# Altium PCB Baja_PDU_004.PcbDoc
Units mil, origin at the board's own origin, x right, y up, seen from the top; angles counter-clockwise.
Board outline 5514 x 3498 mil, 2 copper layers (Top Layer, Bottom Layer); 96 components, 52 nets, 401 pads, 97 vias.
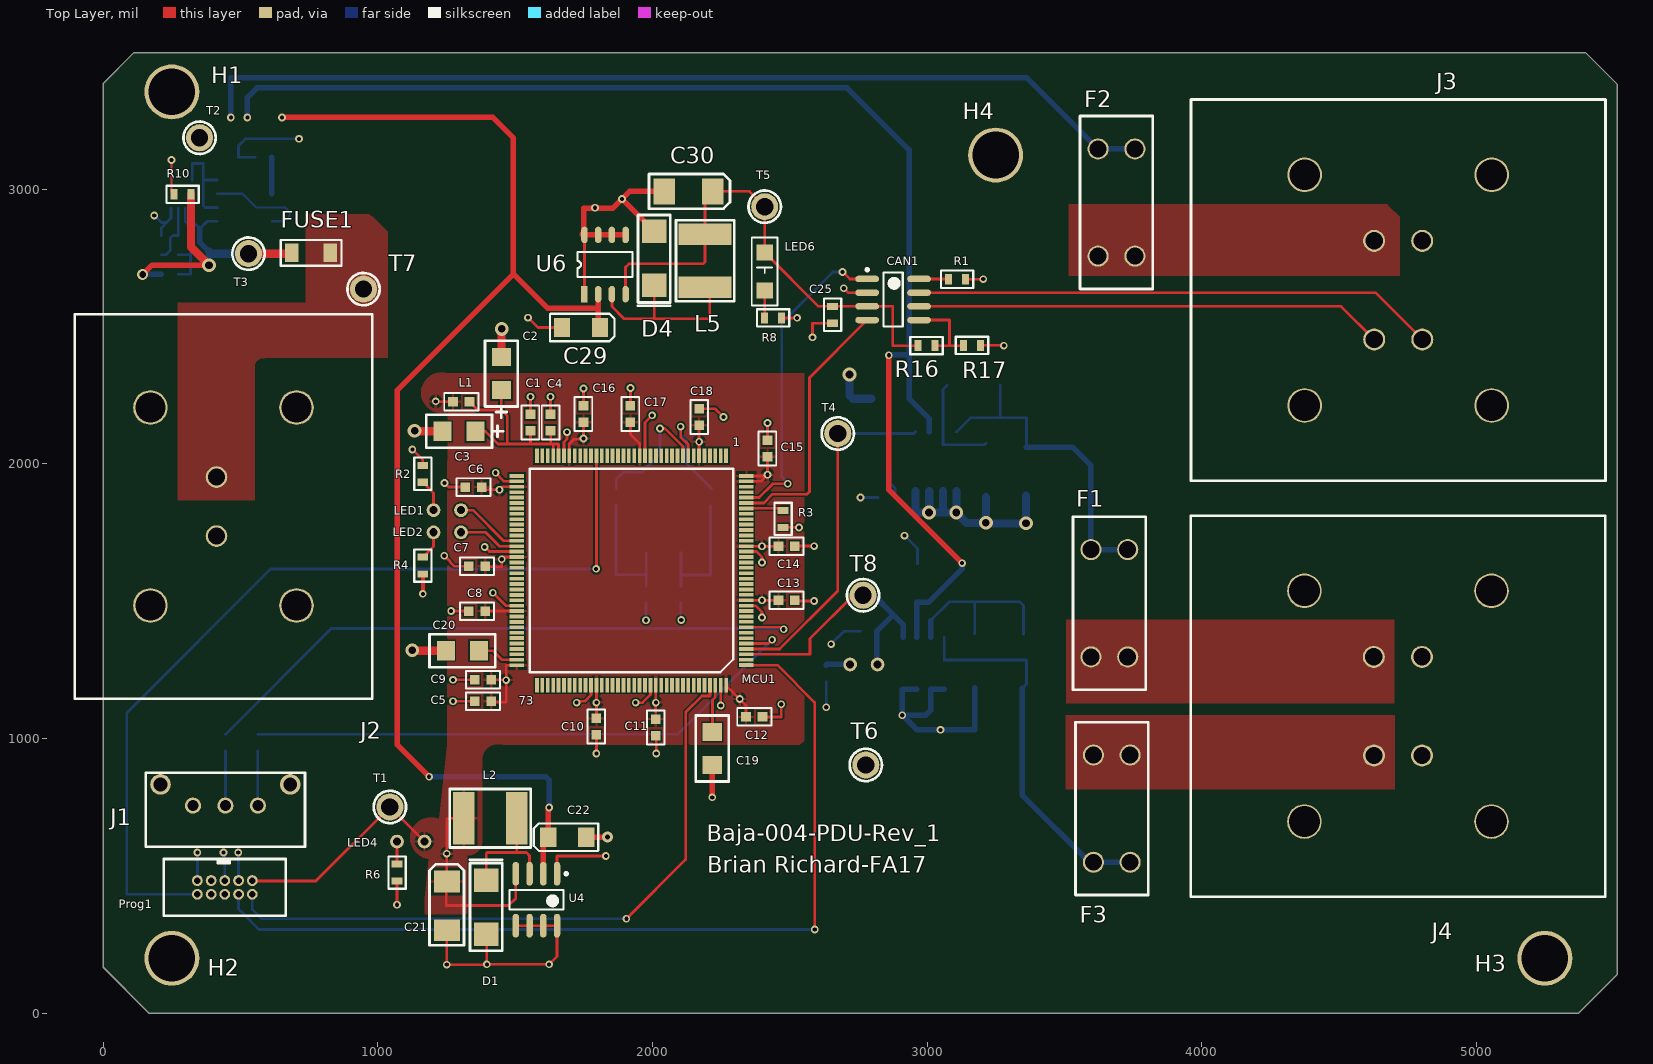
[diagram p0: Top Layer view]
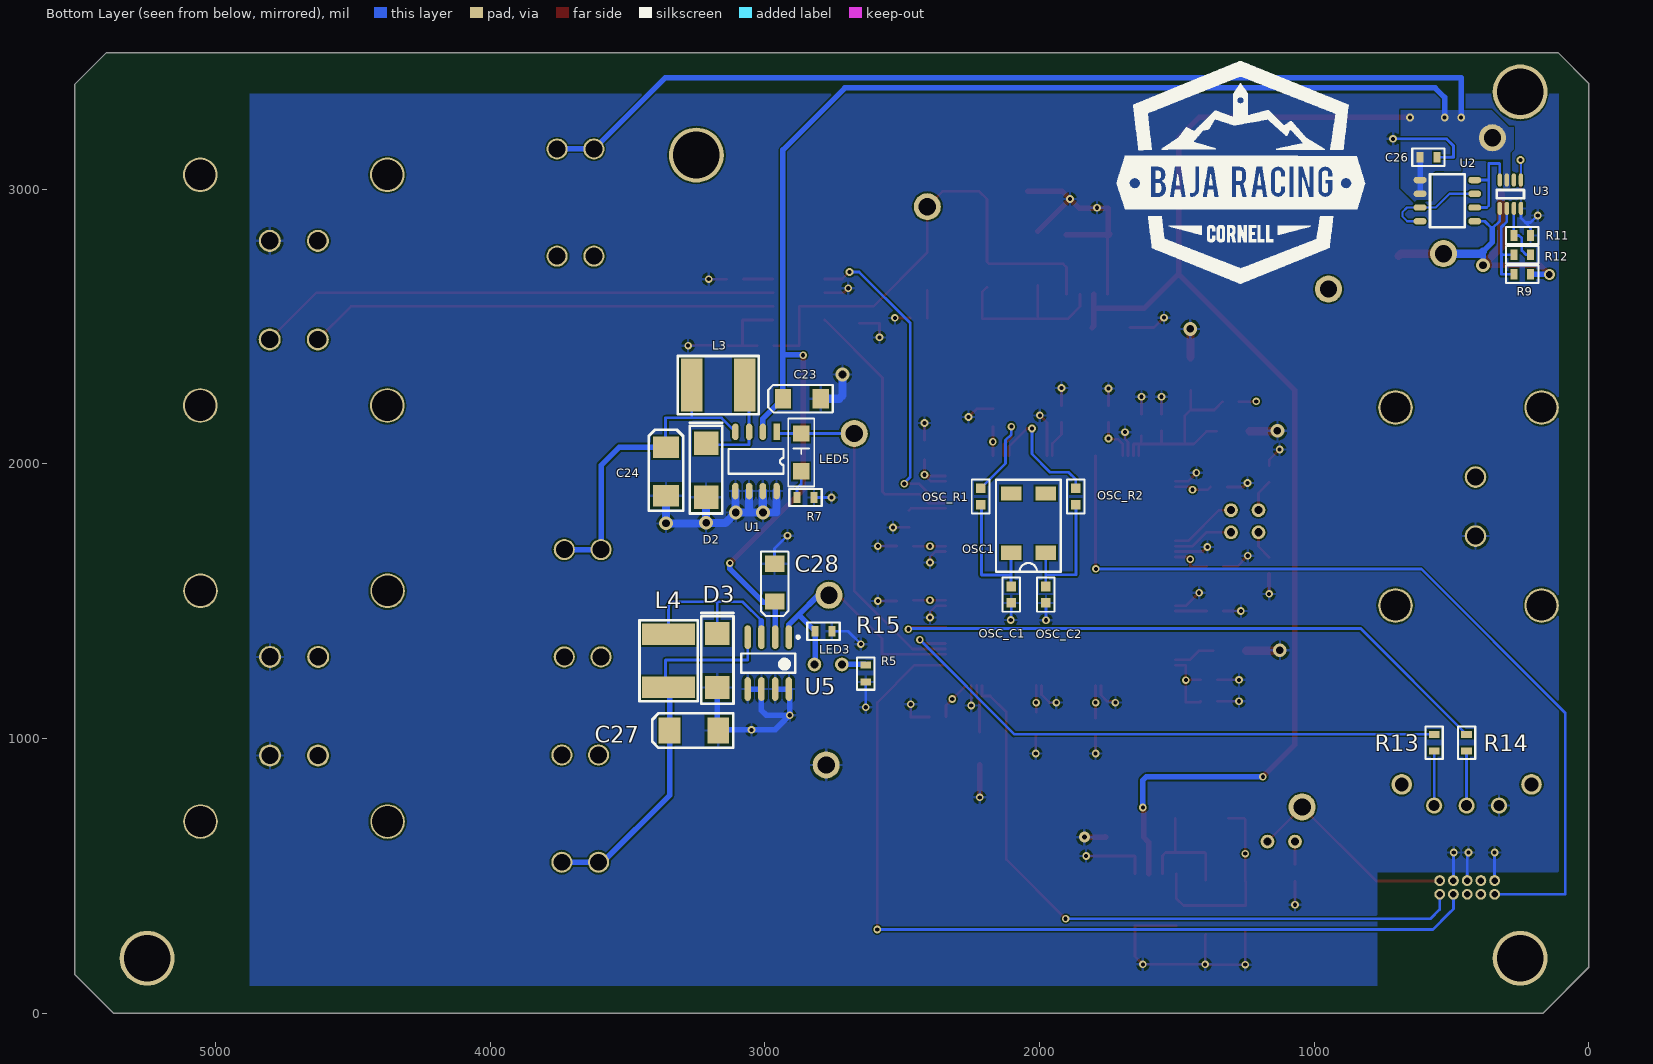
[diagram p1: Bottom Layer view, seen from below]

## Layer stack, top to bottom
Top Solder: solder mask 0.4, Solder Resist, Dk 3.5
Top Layer: signal copper 1.4
Dielectric1: core 12.6, FR-4, Dk 4.8
Bottom Layer: signal copper 1.4
Bottom Solder: solder mask 0.4, Solder Resist, Dk 3.5

## Board outline
0,167 0,3386 112,3498 5398,3498 5514,3382 5514,142 5372,0 167,0

## Design rules (kind name [scope] priority, off if disabled: settings)
Clearance "Fill Spacing" [InPolygon] p1: gap=6
Clearance [All] p2: gap=6
Height [All] p1: minheight=0 maxheight=2500 prefheight=500
HoleSize [All] p1: absolutevalues=TRUE maxlimit=500 minlimit=15 maxpercent=80.000 minpercent=20.000
MinimumAnnularRing MinimumAnnularRing_Component [InComponent('*63')] p1: minimumring=7
MinimumAnnularRing [All] p2: minimumring=5
MinimumSolderMaskSliver MCU [InComponent('MCU1')] p1: minsoldermaskwidth=0
MinimumSolderMaskSliver Prog [InComponent('Prog1')] p2: minsoldermaskwidth=0
MinimumSolderMaskSliver MinimumSolderMaskSliver_1 [All] p3: minsoldermaskwidth=10
PolygonConnect "Power Polys" [All vs (InNet('POWER_IN') OR InNet('POWER') OR InNet('12V') OR InNet('NetF3_3') OR InNet('NetF1_3') OR InNet('NetF2_3'))] p1: connectstyle=Direct reliefconductorwidth=10 reliefentries=4 polygonreliefangle="90 Angle" airgapwidth=10
PolygonConnect PolygonConnect_1 [All] p2: connectstyle=Relief reliefconductorwidth=10 reliefentries=4 polygonreliefangle="90 Angle" airgapwidth=10
RoomDefinition Baja_PDU_004 [InComponentClass('Baja_PDU_004')] p1 off: confinementstyle=ConfineIn formatcopy=TRUE lockcomponents=FALSE outline -1996,-1648.7 4,-1648.7 4,-648.7 -1996,-648.7
RoomDefinition U_JTAG [InComponentClass('U_JTAG')] p2 off: confinementstyle=ConfineIn formatcopy=TRUE lockcomponents=FALSE outline -1996,-1648.7 4,-1648.7 4,-648.7 -1996,-648.7
RoomDefinition J_Serial [InComponentClass('J_Serial')] p3 off: confinementstyle=ConfineIn formatcopy=TRUE lockcomponents=FALSE outline -1996,-1648.7 4,-1648.7 4,-648.7 -1996,-648.7
RoomDefinition U_Power_Supplies [InComponentClass('U_Power_Supplies')] p4 off: confinementstyle=ConfineIn formatcopy=TRUE lockcomponents=FALSE outline -1996,-1648.7 4,-1648.7 4,-648.7 -1996,-648.7
RoomDefinition U_MCU [InComponentClass('U_MCU')] p5 off: confinementstyle=ConfineIn formatcopy=TRUE lockcomponents=FALSE outline -1996,-1648.7 4,-1648.7 4,-648.7 -1996,-648.7
RoomDefinition U_CAN [InComponentClass('U_CAN')] p6 off: confinementstyle=ConfineIn formatcopy=TRUE lockcomponents=FALSE outline -1996,-1648.7 4,-1648.7 4,-648.7 -1996,-648.7
RoutingVias [All] p1: holewidth=28 width=50 viastyle="Through Hole" minholewidth=28 minwidth=50 maxholewidth=28 maxwidth=50
SilkToSolderMaskClearance SilkscreenOverComponentPads [IsPad] p1: minsilkscreentomaskgap=5 clearancetoexposedcopper=TRUE
SolderMaskExpansion [All] p1: expansion=4
UnpouredPolygon [All] p1: allowunpoured=FALSE
Width [All] p1: maxlimit=40 minlimit=4 preferedwidth=10
25 further rules are at their usual default settings.

## Classes and differential pairs
component class Baja_PDU_004: H1 H2 H3 H4 J2 J3 J4
component class J_Serial: J1 R13 R14
component class U_CAN: C25 CAN1 R1 R16 R17
component class U_Power_Supplies: C21 C22 C23 C24 C26 C27 C28 C29 C30 D1 D2 D3 D4 F1 F2 F3 FUSE1 L2 L3 L4 L5 LED3 LED4 LED5 LED6 R5 R6 R7 R8 R9 R10 R11 R12 R15 T1 T2 T3 T4 T5 T6 T7 T8 U1 U2 U3 U4 U5 U6
component class U_JTAG: Prog1
component class U_MCU: C1 C2 C3 C4 C5 C6 C7 C8 C9 C10 C11 C12 C13 C14 C15 C16 C17 C18 C19 C20 L1 LED1 LED2 MCU1 OSC1 OSC_C1 OSC_C2 OSC_R1 OSC_R2 R2 R3 R4

## Components (designator, comment, footprint, x,y, rotation, side; value= is the part's Value field where it differs from the comment)
C1 "Cap" SMD0603 1556,2151 r270 top
C2 "Cap" "SMD1206 Polarized" 1450,2329 r90 top
C3 "Cap" "SMD1206 Polarized" 1296,2119 r180 top
C4 "Cap" SMD0603 1629,2151 r90 top
C5 "Cap" SMD0603 1383,1136 r180 top
C6 "Cap" SMD0603 1348,1916 r0 top
C7 "Cap" SMD0603 1361,1628 r0 top
C8 "Cap" SMD0603 1361,1464.36 r0 top
C9 "Cap" SMD0603 1383,1214 r0 top
C10 "Cap" SMD0603 1796.05,1043.5 r90 top
C11 "Cap" SMD0603 2012.58,1041 r90 top
C12 "Cap" SMD0603 2371,1079 r180 top
C13 "Cap" SMD0603 2489,1503.73 r180 top
C14 "Cap" SMD0603 2489,1700.58 r180 top
C15 "Cap" SMD0603 2419,2056 r270 top
C16 "Cap" SMD0603 1749,2182 r270 top
C17 "Cap" SMD0603 1920,2182 r270 top
C18 "Cap" SMD0603 2170.06,2171 r90 top
C19 "Cap" SMD1206 2218,964 r90 top
C20 "Cap" SMD1206 1308,1320 r0 top
C21 "220 uF Tantalum Capacitor" "2312 Surface Mount (POLAR)" 1204,519 r0 top
C22 "15 uF Tantalum Capacitor" "1206 (POLAR)" 1690,641 r180 top
C23 "15 uF Tant" "1206 (POLAR)" 2866,2238 r0 bottom
C24 "220 uF Tant" "2312 Surface Mount (POLAR)" 3408,2101 r180 bottom
C25 ".1uF 0603" "0603/1608 SMD Resistor" 2656,2543 r270 top
C26 "0603 Cap" "0603/1608 SMD Resistor" 583.98,3117 r180 bottom
C27 "220 uF Tantalum Capacitor" "2312 Surface Mount (POLAR)" 3387,982 r90 bottom
C28 "15 uF Tantalum Capacitor" "1206 (POLAR)" 2965,1568 r270 bottom
C29 "15 uF Tant" "1206 (POLAR)" 1740,2497 r0 top
C30 "220 uF Tant" "2312 Surface Mount (POLAR)" 2259,3040 r270 top
CAN1 "CAN MAX3059" TJA1040 2876.51,2599 r0 top
D1 "B260A Flyback Diode" DO-214AC 1430,535 r270 top
D2 "B260A" DO-214AC 3179,2127 r270 bottom
D3 "B260A Flyback Diode" DO-214AC 3138,1434 r270 bottom
D4 "B260A" DO-214AC 1971,2600 r90 top
F1 "Keystone Fuseholder" "Keystone Fuseholder 3568" 3673,745 r0 top
F2 "Keystone Fuseholder" "Keystone Fuseholder 3568" 3690,2952 r180 top
F3 "Keystone Fuseholder" "Keystone Fuseholder 3568" 3664,1493 r180 top
FUSE1 "SMT fuse" 1206 757,2769 r0 top
H1 "MH-832" MH-832#1 215,3355 r0 top
H2 "MH-832" MH-832#2 217,163 r0 top
H3 "MH-832" MH-832#3 5359,150 r0 top
H4 "MH-832" MH-832#4 3253,3131 r0 top
J1 "Microfit Vert 3" "MICRO-FIT 3 POS VERT THROUGH HOLE" 445,756 r180 top
J2 "DT15-2P" Connector-DT15-2P 446,1845 r180 top
J3 "DT15-4P" DT15-4P 4716,2633 r270 top
J4 "DT15-4P" DT15-4P 4715,1118 r270 top
L1 "BEAD" SMD0603 1304,2227 r0 top
L2 "ASPI-6045S" ASPI-6045 1506,706 r270 top
L3 "Inductor" ASPI-6045 3074,2283 r270 bottom
L4 "ASPI-6045S" ASPI-6045 3347,1380 r180 bottom
L5 "Inductor" ASPI-6045 2188,2644 r180 top
LED1 "Green LED 1206" Panel_Mount_LED 1303,1832 r180 top
LED2 "Green LED 1206" Panel_Mount_LED 1303,1751 r180 top
LED3 "Green LED 1206" Panel_Mount_LED 2820,1270 r180 bottom
LED4 "Green LED 1206" Panel_Mount_LED 1170,625 r180 top
LED5 "Green LED 1206" "Cathode Mark 1206 led footprint" 2868,2111 r270 bottom
LED6 "Green LED 1206" "Cathode Mark 1206 led footprint" 2409,2770 r270 top
MCU1 "STM32F429ZIT6U" LQPF144 1924,1612 r180 top
OSC1 "32.768KHz Oscillator" MC-306-OSC 2041,1785 r90 bottom
OSC_C1 "Cap" SMD0603 2102.99,1524 r90 bottom
OSC_C2 "Cap" SMD0603 1977.01,1524 r90 bottom
OSC_R1 "Res" SMD0603 2215,1881 r90 bottom
OSC_R2 "Res" SMD0603 1868,1881 r90 bottom
Prog1 "JTAG10" "JTAG10 Polarity" 543,483 r270 top
R1 "0603 Res" "0603/1608 SMD Resistor" 3109.51,2673 r180 top
R2 "0603 Res" "0603/1608 SMD Resistor" 1164,1964 r270 top
R3 "0603 Res" "0603/1608 SMD Resistor" 2476,1800 r270 top
R4 "0603 Res" "0603/1608 SMD Resistor" 1164,1630 r90 top
R5 "0603 Res" "0603/1608 SMD Resistor" 2633,1236.86 r90 bottom
R6 "0603 Res" "0603/1608 SMD Resistor" 1070,512 r90 top
R7 "0603 Res" "0603/1608 SMD Resistor" 2852.49,1878 r0 bottom
R8 "0603 Res" "0603/1608 SMD Resistor" 2439.51,2532 r180 top
R9 "0603 Res" "0603/1608 SMD Resistor" 242.39,2691 r0 bottom
R10 "0603 Res" "0603/1608 SMD Resistor" 289,2982 r180 top
R11 "0603 Res" "0603/1608 SMD Resistor" 242.39,2832 r180 bottom
R12 "0603 Res" "0603/1608 SMD Resistor" 242.39,2762 r0 bottom
R13 "0603 Res" "0603/1608 SMD Resistor" 563.11,985 r90 bottom
R14 "0603 Res" "0603/1608 SMD Resistor" 445,985 r90 bottom
R15 "0603 Res" "0603/1608 SMD Resistor" 2787,1391 r0 bottom
R16 "0603 Res" "0603/1608 SMD Resistor" 2998,2431 r0 top
R17 "0603 Res" "0603/1608 SMD Resistor" 3164,2432 r0 top
T1 "Test Point Keystone Compact" "Keystone Test Point Compact" 1044,751 r270 top
T2 "Test Point Keystone Compact" "Keystone Test Point Compact" 351,3188 r180 top
T3 "Test Point Keystone Compact" "Keystone Test Point Compact" 529,2766 r90 top
T4 "Test Point Keystone Compact" "Keystone Test Point Compact" 2675,2111 r0 top
T5 "Test Point Keystone Compact" "Keystone Test Point Compact" 2409,2937 r90 top
T6 "Test Point Keystone Compact" "Keystone Test Point Compact" 2777,904 r0 top
T7 "Test Point Keystone Compact" "Keystone Test Point Compact" 948,2637 r0 top
T8 "Test Point Keystone Compact" "Keystone Test Point Compact" 2767,1522 r270 top
U1 "MIC4680-5.0" SOIC8 3026.37,2007.61 r270 bottom
U2 "Si4946" S0-8 515,2959 r90 bottom
U3 "LTC4365" TS8 304,2978.21 r180 bottom
U4 "MIC4680" TJA1040 1577.63,413.33 r270 top
U5 "MIC4680" TJA1040 2988,1275 r270 bottom
U6 "MIC4680-5.0" SOIC8 1821,2728 r90 top

## Footprints (in the part's own frame and the unit in brackets; to place one, negate y for a bottom-side part, rotate by r counter-clockwise, add the part's x,y. Pads: shape width x height; smd on the part's side, far side on the other; paste and mask are expansions set on the pad)
"0603/1608 SMD Resistor" [mm]
  rect 0.65x1 smd: 1(0.775,0) 2(-0.775,0)
  silkscreen extent -1.5,-0.8 1.5,0.8, body extent -0.8,-0.5 0.8,0.5, height 1.2
1206 [mm]
  rect 1.25x1.7 smd: 1(-1.775,0) 2(1.775,0)
  silkscreen extent -2.8,-1.2 2.8,1.2, body extent -1.6,-0.8 1.6,0.8, height 1.2
"1206 (POLAR)" [mm]
  rect 1.5x1.8 smd: 1(1.75,0) 2(-1.75,0)
  silkscreen extent -2.87,-1.27 3.1,1.27, body extent -1.6,-0.9 1.6,0.9, height 1.2
"2312 Surface Mount (POLAR)" [mm]
  rect 2.4x2 smd: 1(1.2,-1) 2(1.2,-5.5)
  silkscreen extent -0.4,-6.9 2.8,0.6
ASPI-6045 [mm]
  rect 4.9x2 smd: 1(-0.1,0) 2(-0.1,-4.9)
  silkscreen extent -2.8,-6.2 2.6,1.3, body extent -2.5,-5.5 2.3,0.5, height 4.5
"Cathode Mark 1206 led footprint" [mm] "OSRAM semiconductor"
  rect 1.5x1.5 smd: +(0,0) -(3.5,0)
  silkscreen extent -1.4,-1.2 4.9,1.2, body extent 0,-0.7 3.6,0.7, height 1
Connector-DT15-2P [mm]
  round 3.2 hole 2.8: 0(-6.55,9.15) 0(-6.55,-9.16) 0(6.96,9.15) 0(6.96,-9.16)
  round 2 hole 1.6: 1(0.85,-2.73) 2(0.85,2.73)
  silkscreen extent -13.55,-17.78 13.97,17.78, body extent -13.46,-17.65 13.97,17.65, height 3.1
DO-214AC [mm]
  rect 2.16x2.26 smd: 1(1.3,-0.9) 2(6.3,-0.9)
  silkscreen extent -0.6,-2.4 7.8,0.6
DT15-4P [mm]
  round 3.2 hole 2.85: 0(-10.67,8.65) 0(-10.67,-8.65) 0(10.67,8.65) 0(10.67,-8.65)
  round 2.032 hole 1.6: 1(-4.56,-2.23) 2(-4.56,2.22) 3(4.56,2.23) 4(4.56,-2.22)
  silkscreen extent -17.62,-19.18 17.62,19.18, body extent -17.63,-20.7 17.63,17.65, height 30.35
"JTAG10 Polarity" [mm] "3220-10-0100-00"
  round 1 hole 0.6: 1(0,0) 2(1.27,0) 3(0,-1.27) 4(1.27,-1.27) 5(0,-2.54) 6(1.27,-2.54) 7(0,-3.81) 8(1.27,-3.81) 9(0,-5.08) 10(1.27,-5.08)
  silkscreen extent -2,-8.2 3.25,3.1, body extent -2,-8.2 3.25,3.1, height 5.4
"Keystone Fuseholder 3568" [mm]
  round 1.95 hole 1.57: 1(-1.7,-4.96) 2(1.7,-4.96) 3(1.7,4.96) 4(-1.7,4.96)
  silkscreen extent -3.36,-8 3.36,8, body extent -3.36,-8 3.36,8, height 16
"Keystone Test Point Compact" [mm]
  round 2.5 hole 1.6: 1(0,0)
  silkscreen extent -1.5,-1.49 1.5,1.5, body extent -1.31,-1.31 1.31,1.31, height 5.6
LQPF144 [mm]
  rect 0.35x1.35 smd mask+0.025: 1(-8.75,-10.625) 2(-8.25,-10.625) 3(-7.75,-10.625) 4(-7.25,-10.625) 6(-6.25,-10.625) 11(-3.75,-10.625) 12(-3.25,-10.625) 13(-2.75,-10.625) 14(-2.25,-10.625) 19(0.25,-10.625) 20(0.75,-10.625) 21(1.25,-10.625) 22(1.75,-10.625) 23(2.25,-10.625) 25(3.25,-10.625) 27(4.25,-10.625) 28(4.75,-10.625) 33(7.25,-10.625) 35(8.25,-10.625) 36(8.75,-10.625) 73(8.75,10.625) 74(8.25,10.625) 75(7.75,10.625) 76(7.25,10.625) 77(6.75,10.625) 78(6.25,10.625) 79(5.75,10.625) 80(5.25,10.625) 81(4.75,10.625) 86(2.25,10.625) 87(1.75,10.625) 88(1.25,10.625) 89(0.75,10.625) 90(0.25,10.625) 91(-0.25,10.625) 92(-0.75,10.625) 97(-3.25,10.625) 98(-3.75,10.625) 99(-4.25,10.625) 100(-4.75,10.625) 101(-5.25,10.625) 102(-5.75,10.625) 103(-6.25,10.625)
  rect 0.342x1.35 smd mask+0.025: 5(-6.75,-10.625) 7(-5.75,-10.625) 10(-4.25,-10.625) 15(-1.75,-10.625) 18(-0.25,-10.625) 24(2.75,-10.625) 26(3.75,-10.625) 29(5.25,-10.625) 34(7.75,-10.625) 82(4.25,10.625) 85(2.75,10.625) 93(-1.25,10.625) 96(-2.75,10.625) 104(-6.75,10.625)
  rect 0.347x1.35 smd mask+0.025: 8(-5.25,-10.625) 9(-4.75,-10.625) 16(-1.25,-10.625) 17(-0.75,-10.625) 30(5.75,-10.625) 31(6.25,-10.625) 32(6.75,-10.625) 83(3.75,10.625) 84(3.25,10.625) 94(-1.75,10.625) 95(-2.25,10.625) 105(-7.25,10.625) 106(-7.75,10.625) 107(-8.25,10.625) 108(-8.75,10.625)
  rect 1.35x0.342 smd mask+0.025: 37(10.625,-8.75) 40(10.625,-7.25) 48(10.625,-3.25) 53(10.625,-0.75) 60(10.625,2.75) 63(10.625,4.25) 70(10.625,7.75) 110(-10.625,8.25) 114(-10.625,6.25) 115(-10.625,5.75) 117(-10.625,4.75) 119(-10.625,3.75) 122(-10.625,2.25) 129(-10.625,-1.25) 132(-10.625,-2.75) 137(-10.625,-5.25) 141(-10.625,-7.25) 142(-10.625,-7.75)
  rect 1.35x0.347 smd mask+0.025: 38(10.625,-8.25) 39(10.625,-7.75) 49(10.625,-2.75) 50(10.625,-2.25) 51(10.625,-1.75) 52(10.625,-1.25) 61(10.625,3.25) 62(10.625,3.75) 71(10.625,8.25) 72(10.625,8.75) 111(-10.625,7.75) 112(-10.625,7.25) 113(-10.625,6.75) 120(-10.625,3.25) 121(-10.625,2.75) 130(-10.625,-1.75) 131(-10.625,-2.25) 138(-10.625,-5.75) 139(-10.625,-6.25) 140(-10.625,-6.75)
  rect 1.35x0.35 smd mask+0.025: 41(10.625,-6.75) 42(10.625,-6.25) 43(10.625,-5.75) 44(10.625,-5.25) 45(10.625,-4.75) 46(10.625,-4.25) 47(10.625,-3.75) 54(10.625,-0.25) 55(10.625,0.25) 56(10.625,0.75) 57(10.625,1.25) 58(10.625,1.75) 59(10.625,2.25) 64(10.625,4.75) 65(10.625,5.25) 66(10.625,5.75) 67(10.625,6.25) 68(10.625,6.75) 69(10.625,7.25) 109(-10.625,8.75) 116(-10.625,5.25) 118(-10.625,4.25) 123(-10.625,1.75) 124(-10.625,1.25) 125(-10.625,0.75) 126(-10.625,0.25) 127(-10.625,-0.25) 128(-10.625,-0.75) 133(-10.625,-3.25) 134(-10.625,-3.75) 135(-10.625,-4.25) 136(-10.625,-4.75) 143(-10.625,-8.25) 144(-10.625,-8.75)
  silkscreen extent -9.41,-9.41 9.41,9.41
MC-306-OSC [mm]
  rect 1.3x1.9 smd: 1(-2.75,-1.6) 2(2.75,-1.6) 3(2.75,1.6) 4(-2.75,1.6)
  silkscreen extent -4.5,-3 4,3
MH-832#1 [mil]
  round 200 hole 170: 0(35,0)
MH-832#2 [mil]
  round 200 hole 170: 0(33,37)
MH-832#3 [mil]
  round 200 hole 170: 0(-109,50)
MH-832#4 [mil]
  round 200 hole 170: 0(-3,-6)
"MICRO-FIT 3 POS VERT THROUGH HOLE" [mm] "WM1918-ND"
  round 1.5 hole 1.02: 1(-3,0) 2(0,0) 3(3,0)
  round 1.905 hole 1.27: SO(-6,-1.96) SO(6,-1.96)
  silkscreen extent -7.37,-3.05 7.37,3.81, body extent -6.32,-2.47 6.33,3.14, height 9.9
Panel_Mount_LED [mil]
  round 50 hole 30: +(0,0) -(100,0)
S0-8 [mm]
  oval 0.599x1.194 smd: 1(-1.905,-2.527) 2(-0.635,-2.527) 3(0.635,-2.527) 4(1.905,-2.527) 5(1.905,2.527) 6(0.635,2.527) 7(-0.635,2.527) 8(-1.905,2.527)
  round 0.599 on Bottom Overlay: 6(-3.7,-2.5)
  silkscreen extent -2.45,-1.6 2.45,1.6, body extent -2.45,-1.6 2.45,1.6, height 1
SMD0603 [mil]
  rect 35x35 smd: 1(-30,0) 2(30,0)
  silkscreen extent -62,-32 62,32, body extent -31,-16 32,16, height 18
SMD1206 [mil]
  rect 65x70 smd: 1(-60,0) 2(60,0)
  silkscreen extent -120,-60 120,60, body extent -61,-30 61,31, height 22
"SMD1206 Polarized" [mil]
  rect 65x70 smd: 1(-60,0) 2(60,0)
  silkscreen extent -160,-60 120,60, body extent -61,-30 61,31, height 22
SOIC8 [mm]
  rect 1.52x0.6 smd: 1(-2.782,1.742)
  oval 1.52x0.6 smd: 2(-2.782,0.472) 3(-2.782,-0.798) 4(-2.782,-2.068) 5(2.698,-2.068) 6(2.698,-0.798) 7(2.698,0.472) 8(2.698,1.742)
  silkscreen extent -1.19,-2.7 1.1,2.38
TJA1040 [mm] "SOIC, 8-Leads, Body 5.0x4.0mm (max), Pitch 1.27mm, IPC Medium Density"
  oval 2.2x0.6 smd: 1(-2.4,1.905) 2(-2.4,0.635) 3(-2.4,-0.635) 4(-2.4,-1.905) 5(2.4,-1.905) 6(2.4,-0.635) 7(2.4,0.635) 8(2.4,1.905)
  silkscreen extent -2.52,-2.5 0.9,2.88, body extent -2,-2.5 2,2.5, height 1.75
TS8 [mm]
  round 0.508 on Bottom Overlay: 0(-1.44,-1.417)
  oval 0.4x1.22 smd: 1(-0.51,-1.203) 2(0.14,-1.203) 3(0.79,-1.203) 4(1.44,-1.203) 5(1.44,1.417) 6(0.79,1.417) 7(0.14,1.417) 8(-0.51,1.417)
  silkscreen extent -0.8,-0.27 1.74,0.49, body extent -0.8,-0.27 1.73,0.49, height 1

## Part data
C1 C4 C5 C6 C7 C8 C9 C10 C11 C12 C13 C14 C15 C16 C17 C18 C19 C20 OSC_C1 OSC_C2: library part "Capacitor Ceramic", "Ceramic Chip Capacitor"
C2 C3: library part "Capacitor Polarized", "Polarized Capacitor (Surface Mount)"
C21 C27: "2312 Surface Mount Capacitor"
C22 C28: "1206 Surface Mount Capacitor"
C23 C29: library part "15 uF Tantalum Capacitor", "1206 Surface Mount Capacitor"
C24 C30: library part "220 uF Tantalum Capacitor", "2312 Surface Mount Capacitor"
C25: library part "0603 Cap"
C26: "100 uF electrolytic cap"
D2 D4: library part "B260A Flyback Diode"
FUSE1: library part "0 Resistor Surface mount 1206", "0 ohm surface mount resistor."
J1: library part "Micro-fit 3 Pos Vertical Through Hole"
J2: library part Connector-DT15-2P
J3 J4: library part Connector-DT15-4P
L1: library part "Chip Ferrite Bead", "Ferrite Bead"
L2 L4: "68 uH 1.2A surface mount inductor"
LED1 LED2 LED3 LED4 LED5 LED6: library part "1206 Green LED", "Green surface mount LED"
OSC1: library part "MC-306 32.768K-E3", "32.7680kHz Oscillator"
OSC_R1 OSC_R2: library part Resistor, "Resistor"
Prog1: "3220-10-0100-00"
R9: "6.04 MOhm Res"
R10: "100 kOhm SMD Res"
R11: "210 kOhm Res"
R13 R14: "220 Ohm Res"
R15: "Pull Down, 1kOhm"
U1 U6: "5V Fixed Switching Regulator 1A"
U4 U5: "3.3V Fixed Switching Regulator 1A"

## Via types
v1: diameter 28, hole 15, Top Layer to Bottom Layer, 86 vias
v2: diameter 50, hole 28, Top Layer to Bottom Layer, 9 vias
v3: diameter 40, hole 25, Top Layer to Bottom Layer, 1 vias
v4: diameter 40, hole 18, Top Layer to Bottom Layer, 1 vias

## Nets (pads, with @x,y where several pads share a name; then routed paths per layer and width w, separated by ;. In a path a pad name is that pad's centre, name@x,y a point inside that pad or via, vN(x,y) a via of type N, cw(c..) or ccw(c..) an arc to the next point about the centre after c; other vN are vias at no path point)
3V3: C5.1 C6.2 C7.2 C8.2 C9.2 C10.2 C11.2 C12.2 C13.2 C14.2 C15.2 C16.2 C17.2 C18.1 C21.1 L1.1 L2.2 LED4.+ MCU1.6 MCU1.17 MCU1.30 MCU1.39 MCU1.52 MCU1.62 MCU1.72 MCU1.84 MCU1.95 MCU1.108 MCU1.121 MCU1.131 MCU1.143 MCU1.144 Prog1.1 T1.1 U4.4 | length 3489.5
  Top Layer w10: Prog1.1@543,470 554,481 774,481 T1.1 LED4.+ ; v1@1210,2227 L1.1 ; L2.2 1255.94,709.94 1251.24,705.24 C21.1 1249,477.39 1249,392 1476,392 1502.63,418.63 U4.4 ; C6.2 1388,1906 v1(1443,1906) 1454.12,1917.12 MCU1.39 ; C8.2 MCU1.62 ; C7.2 1392.79,1626.21 1451.21,1626.21 1451.21,1661.21 MCU1.52 ; C5.1 1416.49,1132.51 1467.51,1132.51 v1(1467.51,1213) ; C9.2 1466.51,1214 v1(1467.51,1213) ; MCU1.72 1467.51,1267.51 v1(1467.51,1213) ; MCU1.30 1697.62,2073.62 1714,2090 1746,2090 v1(1749,2093) C16.2 ; C10.2@1796.05,1073.95 MCU1.84 ; C17.2 1920,2108 1953.53,2074.47 MCU1.17 ; 2012.58,1096 MCU1.95 ; MCU1.6 C18.1@2170.06,2136 ; MCU1.108 2341,1121.18 C12.2 ; MCU1.121 C13.2 ; MCU1.131 C14.2 ; MCU1.143 2394.8,1936.8 v1@2414.49,1956.49 ; MCU1.144 v1@2414.49,1956.49 ; C15.2@2419,2016 v1(2419,1961) v1@2414.49,1956.49
  other v1: 1251.24,581 1796.05,1131 2012.58,1131 2318.18,1144 2399,1503.73 1451.21,1653 2399,1700.58 2170.06,2081 1211,2228
3V3-ENABLE: LED3.+ MCU1.111 R15.1 T8.1 U5.1 | length 1002.2
  Top Layer w10: MCU1.111 2573.88,1306.88 2573.88,1363.88 2732,1522 T8.1
  Bottom Layer w20: T8.1@2756,1525 2764,1525 T8.1 2806,1522 2878,1450 ; LED3.+ 2817.51,1272.49 R15.1 2876.51,1450 2878,1450 ; U5.1 2913,1415 2878,1450
5V: C25.2 C30.1 CAN1.3 L5.2 LED6.+ R16.2 T5.1 U6.4 | length 1826
  Top Layer w10: U6.4 1902.43,2716.43 1915,2729 2185,2729 2191.94,2735.94 L5.2 2191.94,2965.06 C30.1 2353.24,2992.76 T5.1 LED6.+ 2605,2574 CAN1.3 2875,2574 2875,2431 R16.2
5V-ENABLE: LED5.+ MCU1.112 T4.1 U1.1 | length 1278.6
  Top Layer w10: MCU1.112 2463.57,1326.57 2675,1538 T4.1
  Bottom Layer w10: T4.1 LED5.+ 2951.65,2111 U1.1
12V: C22.1 C23.1 C26.2 C28.1 C29.1 F2.1 F2.2 T2.1 U1.2 U2.5 U2.6@614.49,2984 U3.7 U4.2 U5.2 U6.2 | length 13325.2
  Top Layer w20: v1(651,3262) 1419,3262 1494,3187 1494,2692 ; v1@1186,862 1071,977 1071,2269 1494,2692 ; U4.2 1602.63,622.52 C22.1 1621.1,746.1 v1(1624,749) ; U6.2 1802.43,2568 ; C29.1 1802.43,2503.46 1802.43,2568 ; v1(2861,2396) 2861,1906 v1(3128,1639) ; 1494,2692 1618,2568 1802.43,2568
  Bottom Layer w20: v1(465,3262) 465,3406 3363.35,3406 3622.07,3147.28 F2.1@3755.93,3147.28 ; v1(525,3262) 525,3335 560,3370 2709,3370 2934.9,3144.1 2934.9,2398 ; U2.6@614.49,2984 U2.5 C26.2 ; v1(1187,861) 1612,861 1624,849 v1@1624,751 ; v1@2860,2398 2934.9,2398 ; U5.2 2963,1497.1 3007.1,1497.1 3128,1618 v1(3128,1639) ; U1.2 3007.81,2165.09 C23.1 2934.9,2398
BLINKY_LED_1: LED1.+ MCU1.49 | length 249
  Top Layer w10: LED1.+ 1347,1832 1458.73,1720.27 MCU1.49
BLINKY_LED_2: LED2.+ MCU1.50 | length 223.6
  Top Layer w10: LED2.+ 1393,1751 1443.42,1700.58 MCU1.50
CAN0RX: CAN1.4 MCU1.139 | length 958.6
  Top Layer w10: MCU1.139 2406.06,1858.06 2438,1890 2563,1890 2572,1899 2572,2313.98 CAN1.4
CAN0TX: CAN1.1 MCU1.140 | length 1162.9
  Top Layer w10: MCU1.140 2388.75,1877.75 2439,1928 v1(2493,1928) ; v1@2694,2699 2719,2674 CAN1.1
  Bottom Layer w10: v1@2495,1928 2471,1952 2471,2513 2657,2699 v1(2692,2699)
CAN_H: CAN1.7 J3.3 | length 1903.4
  Top Layer w10: CAN1.7 4633.27,2624 J3.3
CAN_L: CAN1.6 J3.4 | length 1707.5
  Top Layer w10: CAN1.6 4508.07,2574 J3.4
GND: C1.1 C2.2 C3.2 C4.2 C5.2 C6.1 C7.1 C8.1 C9.1 C10.1 C11.1 C12.1 C13.1 C14.1 C15.1 C16.1 C17.1 C18.2 C19.1 C20.1 C21.2 C22.2 C23.2 C24.2 C25.1 C26.1 C27.2 C28.2 C29.2 C30.2 CAN1.2 D1.2 D2.2 D3.2 D4.2 J1.3 J2.2 J3.2 J4.2 J4.3 MCU1.16 MCU1.31 MCU1.38 MCU1.51 MCU1.61 MCU1.83 MCU1.94 MCU1.107 MCU1.120 MCU1.130 OSC_C1.1 OSC_C2.1 Prog1.3 Prog1.5 Prog1.9 R1.2 R2.2 R3.1 R4.2 R5.2 R6.2 R7.2 R8.2 R11.1 R15.2 R17.1 T6.1 U1.5 U1.6 U1.7 U1.8 U3.4 U4.1 U4.5 U4.6 U4.7 U4.8 U5.5 U5.6 U5.7 U5.8 U6.1 U6.5 U6.6 U6.7 U6.8 | length 8965.2
  Top Layer w10: v1@1070,385 R6.2 ; v1(1126,2053) 1164,2015 R2.2 ; v1(1242,1666) 1264.06,1643.94 1264.06,1641.94 1278,1628 C7.1 ; v1(1243,1931) 1258,1916 C6.1 ; C21.2 v1(1251.24,176.76) 1395.76,176.76 v1(1397,178) ; v1(1267,1464.36) C8.1 ; v1(1274,1136) C5.2 ; v1(1274,1214) C9.1 ; v1(1389,1698) 1406.1,1680.9 MCU1.51 ; D1.2 1397,284.54 v1(1397,178) ; v1(1419,1531) 1465.95,1484.05 MCU1.61 ; v1(1429,1968) 1460.2,1936.8 MCU1.38 ; U4.5 U4.6 U4.7 U4.8 1652.63,206.63 v1(1624,178) v1(1397,178) ; v1(1547,2533) 1583,2497 C29.2 ; C1.1 v1(1556,2245) ; C4.2 v1(1629,2245) ; U4.1 1652.63,572.63 v1(1830.63,572.63) ; MCU1.31 1677.94,2079.94 1689,2091 v1(1689,2116) ; v1(1724,1131) 1729,1136 1754,1136 1776.36,1158.36 MCU1.83 ; C16.1 v1@1749,2277 ; U6.1 U6.8 ; v1(1796.05,946) 1796.05,953.95 C10.1@1796.05,1011 ; C17.1 v1(1920,2277) ; v1(1939,1131) 1964,1131 1992.9,1159.9 MCU1.94 ; MCU1.16 1973.21,2151.21 v1(1999,2177) ; C11.1 2014,1009.58 v1(2014,946) ; C18.2 2229,2201 v1(2259,2171) ; v1(2248.8,1120.2) MCU1.107 ; MCU1.120 2375.95,1484.05 2399,1461 v1(2399,1441) ; MCU1.130 2378.9,1680.9 2399,1660.79 v1(2399,1641) ; C12.1 2469,1079 v1(2469,1125) ; C15.1 v1@2419,2148 ; R8.2 v1(2527,2532) ; R3.1 v1@2533.51,1769.49 ; C13.1@2519,1501 v1(2589,1501) ; C14.1@2519,1701 v1@2594,1701 ; v1(2583,2461) 2583,2512.49 C25.1 ; v1(2697,2640) 2713,2624 CAN1.2 ; R1.2 v1(3205,2673) ; R17.1 v1@3280,2432
  Top Layer w15: v1(1164,1527) R4.2
  Top Layer w20: U6.8@1750,2836.64 1750,2931 1855,2931 1916.76,2992.76 C30.2 ; U6.8 U6.7 U6.6 U6.5 ; C22.2 1760.9,643 1762.9,641 v4(1837,641) ; v1(1889.23,2965.23) D4.2 ; v1(2218,786) C19.1
  Top Layer w30: v2@1125,1320 C20.1 ; v2@1132,2119 C3.2 ; C2.2 v2@1450,2492 ; U6.8@1750,2836.64 U6.8
  Bottom Layer w10: v1(186,2905) 212,2879 231,2879 ; R11.1 211.87,2859.87 231,2879 ; U3.4 247.31,2895.31 231,2879 ; Prog1.9 v1(343,585) ; v1@438,582 443,577 Prog1.5 ; v1@492,582 493,581 Prog1.3 ; C26.1 493,3117 493,3159 518,3184 v1(713,3184) ; v1(1977.01,1431) OSC_C2.1 ; v1@2102.99,1434.01 OSC_C1.1 ; v1(2633,1114) R5.2 ; v1(2651,1344) 2698,1391 R15.2 ; v1(2758,1878) R7.2 ; v1(2918,1739) 2965,1692 C28.2
  Bottom Layer w20: U5.7 U5.8 2910,1177.51 v1(2910,1085) ; U5.5 U5.6 3013,1103 2995,1085 v1(2910,1085) ; D3.2 3173.43,1032.21 2962.79,1032.21 v1(2910,1085)
  Bottom Layer w30: v2(2718,2326) 2718,2250 2730,2238 C23.2 ; U1.8 2957.81,1823.19 v2(3007,1823.19) ; U1.7 3007.81,1824 v2(3007,1823.19) ; U1.6 3057.81,1824.39 3059,1823.19 ; U1.5 3107.81,1824.19 v2(3106.81,1823.19) ; D2.2 v2(3214.43,1785.57) ; C24.2 v2(3360.76,1783.76) 3216.24,1783.76 v2(3214.43,1785.57) ; v2(3007,1823.19) 3059,1823.19 ; 3059,1823.19 v2(3106.81,1823.19) ; v2(3106.81,1823.19) 3144.43,1785.57 v2(3214.43,1785.57)
  other v1: 1070,395 438,585 492,585 3049,1032 2105,1432 2589,1701 2534,1769 2419,2149 1749,2275 3280,2431 1791,2933
  other v2: 1125,1322 1134,2121 1451,2492
NetC1_2: C1.2 C2.1 C3.1 C4.1 L1.2 MCU1.32 MCU1.33 | length 816.4
  Top Layer w10: L1.2 1364,2197 1450,2197 ; C3.1 1392,2119 1438,2073 1471,2073 ; C2.1 1450,2197 ; C1.2 1556,2074 1557,2073 ; 1630.25,2101.75 1630.25,2073 ; MCU1.33 1638.57,2072.43 ; MCU1.32 1658.25,2073 1630.25,2073 ; 1450,2197 1471,2176 1471,2073 ; 1471,2073 1557,2073 ; 1557,2073 1630.25,2073
NetC19_2: C19.2 MCU1.106 | length 174.3
  Top Layer w10: C19.2 2219,1025 2219,1141 2229.12,1151.12 MCU1.106
NetC20_2: C20.2 MCU1.71 | length 151.3
  Top Layer w10: C20.2 1420,1320 1452.8,1287.2 MCU1.71
NetC24_1: C24.1 F3.1 F3.2 L3.2 U1.4 | length 1206.7
  Bottom Layer w10: U1.4 3158.65,2168 3265,2168 ; L3.2 3266.91,2169.91 3265,2168 ; C24.1 3362,2062.87 3362,2168 3265,2168
  Bottom Layer w20: C24.1 3530.37,2061.63 3597.07,1994.93 F3.2 3598.07,1687.28 F3.1@3730.93,1687.28
NetC27_1: C27.1 F1.1 F1.2 L4.2 U5.4 | length 1368.2
  Bottom Layer w10: U5.4 3063,1286 3362,1286 3362,1198.15 L4.2 L4.2@3347.63,1183.78
  Bottom Layer w20: L4.2@3347.63,1183.78 C27.1 3347.63,793.37 3591.28,549.72 F1.1 3723.93,549.72 F1.2@3730.93,542.72
NetCAN1_5: CAN1.5 R16.1 R17.2 | length 310
  Top Layer w10: CAN1.5 3082,2524 3082,2431 ; R16.1 3082,2431 ; R17.2 3133.49,2431 3082,2431
NetCAN1_8: CAN1.8 R1.1 | length 108.4
  Top Layer w10: CAN1.8 3078,2674 R1.1
NetD1_1: D1.1 L2.1 U4.3 | length 452.5
  Top Layer w10: D1.1 1394.57,581.57 1398,585 1506,585 ; L2.1 1506,585 ; U4.3 1552.63,573.37 1541,585 1506,585
NetD2_1: D2.1 L3.1 U1.3 | length 382.4
  Bottom Layer w10: L3.1 3057.81,2270.74 U1.3 3057.81,2070.19 3208.81,2070.19 D2.1
NetD3_1: D3.1 L4.1 U5.3 | length 653.7
  Bottom Layer w10: 3013,1430 3081,1498 3177,1498 ; D3.1 3173.43,1494.43 3177,1498 ; L4.1 3350.94,1485.06 3338,1498 3177,1498
  Bottom Layer w20: U5.3 3013,1430
NetD4_1: D4.1 L5.1 U6.3 | length 664.4
  Top Layer w10: U6.3 1852.43,2573.57 1897,2529 2007,2529 ; D4.1 2007,2650.61 2007,2529 ; L5.1 2209,2626.94 2209,2529 2007,2529
NetF1_3: F1.3 F1.4 J4.4
NetF2_3: F2.3 F2.4 J3.1
NetF3_3: F3.3 F3.4 J4.1
NetJ1_1: J1.1 R13.2 | length 198.5
  Bottom Layer w10: J1.1 R13.2
NetJ1_2: J1.2 R14.2 | length 198.5
  Bottom Layer w10: J1.2 R14.2
NetLED1_-: LED1.- R2.1 | length 117.6
  Top Layer w10: R2.1 1203,1894.49 LED1.-
NetLED2_-: LED2.- R4.1 | length 106.6
  Top Layer w10: R4.1 1203,1699.51 LED2.-
NetLED3_-: LED3.- R5.1 | length 88.1
  Bottom Layer w20: R5.1 2635.63,1270 LED3.-
NetLED4_-: LED4.- R6.1 | length 82.5
  Top Layer w10: R6.1 LED4.-
NetLED5_-: LED5.- R7.1 | length 101.4
  Bottom Layer w10: LED5.- 2868,1927 2883,1912 R7.1
NetLED6_-: LED6.- R8.1 | length 100.2
  Top Layer w10: R8.1 LED6.-
NetMCU1_138: MCU1.138 R3.2 | length 137
  Top Layer w10: MCU1.138 2468.13,1838.38 R3.2
NetOSC1_1: OSC1.1 OSC_C2.2 OSC_R2.1 | length 487.2
  Bottom Layer w10: OSC_R2.1 1867,1850 1867,1597 1978.01,1597 ; OSC_C2.2@1978.01,1555 1978.01,1597 ; OSC1.1 1978.01,1597
NetOSC1_4: OSC1.4 OSC_C1.2 OSC_R1.1 | length 481.7
  Bottom Layer w10: OSC_C1.2@2103.99,1555 2103.99,1596 ; OSC1.4 2103.99,1596 ; OSC_R1.1@2212,1848 2212,1596 2103.99,1596
NetR9_1: R9.1 R12.1 U3.2 | length 335
  Bottom Layer w10: R9.1 318,2691 318,2766 319,2767 319,2862 298.49,2882.51 U3.2 ; R12.1 314,2762
NetR10_1: R10.1 U3.5 | length 190.2
  Top Layer w8: R10.1@249,2991.49 v1(249,3107)
  Bottom Layer w8: U3.5 v1@247.31,3108.69
NetR11_2: R11.2 R12.2 U3.3 | length 215.2
  Bottom Layer w10: R12.2 229,2762 244,2777 244,2822 254,2832 R11.2 U3.3
NetU2_2: U2.2 U2.4 U3.8 | length 357.1
  Bottom Layer w10: U3.8 324.08,3092.08 326,3094 364,3094 364,3034 ; U2.2 372,2934 364,2942 364,3034 ; U2.4 364,3034
NetU2_3: U2.3 U2.7 U2.8 | length 378.2
  Bottom Layer w8: U2.3 507,2984 557,2934 U2.7 662,2934 679,2917 679,2902 661,2884 U2.8
NRST: MCU1.25 Prog1.10 | length 3256.8
  Top Layer w10: v1(1795,1618) 1796.05,1619.05 MCU1.25
  Bottom Layer w10: Prog1.10 86,433 86,1094 610,1618 v1(1795,1618)
PC14-OSC32_IN: MCU1.8 OSC_R1.2 | length 388.6
  Top Layer w10: v1(2103,2136) 2103,2098.21 2130.69,2070.52 MCU1.8
  Bottom Layer w10: v1(2103,2136) 2103,2108 2124,2087 2124,2002 OSC_R1.2
PC15-OSC32_OUT: MCU1.9 OSC_R2.2 | length 467.7
  Top Layer w10: v1(2028,2129) 2046,2129 2111.01,2063.99 MCU1.9
  Bottom Layer w10: OSC_R2.2 1868,1944 1894,1970 1962,1970 2028,2036 v1(2028,2129)
POWER: FUSE1.1 R9.2 R10.2 T3.1 U2.1 U3.1 | length 1229.4
  Top Layer w20: v3(144,2690) 178,2724 v2(385,2724)
  Top Layer w30: R10.2 319.51,2789.49 v2(385,2724) ; T3.1 684.12,2766 FUSE1.1@693.12,2757
  Bottom Layer w10: U3.1 324.08,2884.92 352,2857 379,2884 U2.1
  Bottom Layer w20: v3@145,2691 R9.2 ; 352,2857 352,2807 385,2774 v2@385,2725
  Bottom Layer w30: v3(144,2690) v3@145,2691 ; 385,2774 393,2766 T3.1
POWER_IN: FUSE1.2 J2.1 T7.1
SERIAL_RX: MCU1.116 R14.1 | length 2332.6
  Top Layer w10: MCU1.116 2470.69,1405.31 v1(2478,1398)
  Bottom Layer w10: R14.1 830.49,1401 2475,1401 v1(2478,1398)
SERIAL_TX: MCU1.113 R13.1 | length 2115
  Top Layer w10: MCU1.113 2422.25,1346.25 v1(2436,1360)
  Bottom Layer w10: R13.1 2091.51,1015.51 v1(2436,1360)
SWCLK: MCU1.109 Prog1.4 | length 3313.9
  Top Layer w10: MCU1.109 2455.49,1267.51 2591,1132 v1(2591,305)
  Bottom Layer w10: Prog1.4 493,380 510,363 568,305 v1(2591,305)
SWDIO: MCU1.105 Prog1.2 | length 2424.9
  Top Layer w10: v1(1905,344) 2121,560 2121,1096 2180,1155 2210,1155 2210,1193.13 MCU1.105
  Bottom Layer w10: Prog1.2 543,402 543,378 577,344 v1(1905,344)
SWO: Prog1.6
pads on no net: H1.0 H2.0 H3.0 H4.0 J1.SO J2.0 J3.0 J4.0 MCU1.1 MCU1.2 MCU1.3 MCU1.4 MCU1.5 MCU1.7 MCU1.10 MCU1.11 MCU1.12 MCU1.13 MCU1.14 MCU1.15 MCU1.18 MCU1.19 MCU1.20 MCU1.21 MCU1.22 MCU1.23 MCU1.24 MCU1.26 MCU1.27 MCU1.28 MCU1.29 MCU1.34 MCU1.35 MCU1.36 MCU1.37 MCU1.40 MCU1.41 MCU1.42 MCU1.43 MCU1.44 MCU1.45 MCU1.46 MCU1.47 MCU1.48 MCU1.53 MCU1.54 MCU1.55 MCU1.56 MCU1.57 MCU1.58 MCU1.59 MCU1.60 MCU1.63 MCU1.64 MCU1.65 MCU1.66 MCU1.67 MCU1.68 MCU1.69 MCU1.70 MCU1.73 MCU1.74 MCU1.75 MCU1.76 MCU1.77 MCU1.78 MCU1.79 MCU1.80 MCU1.81 MCU1.82 MCU1.85 MCU1.86 MCU1.87 MCU1.88 MCU1.89 MCU1.90 MCU1.91 MCU1.92 MCU1.93 MCU1.96 MCU1.97 MCU1.98 MCU1.99 MCU1.100 MCU1.101 MCU1.102 MCU1.103 MCU1.104 MCU1.110 MCU1.114 MCU1.115 MCU1.117 MCU1.118 MCU1.119 MCU1.122 MCU1.123 MCU1.124 MCU1.125 MCU1.126 MCU1.127 MCU1.128 MCU1.129 MCU1.132 MCU1.133 MCU1.134 MCU1.135 MCU1.136 MCU1.137 MCU1.141 MCU1.142 OSC1.2 OSC1.3 Prog1.7 Prog1.8 U2.6@416.57,2813.33 U3.0 U3.6

## Polygon pours and split planes (outlines as drawn)
NetF1_3 on Top Layer "3Out" (solid, remove dead copper, pour order 14): 3506,1085 3506,847 3506,816 4710,816 4703,816 4703,1085 3506,1085
NetF3_3 on Top Layer "5Out" (solid, remove dead copper, pour order 13): 3507,1433 3507,1128 3520,1128 4702,1128 4702,1433 3507,1433
POWER_IN on Top Layer "POWER_IN" (solid, remove dead copper, pour order 10): 271,1868 552,1868 552,2330 552,2348 cw(c583.55,2353.45) 589,2385 1037,2385 1037,2846 984,2899 ccw(c956.24,2869.53) 955.03,2910 795,2910 738,2910 738,2604 738,2588 272,2588 272,1868
3V3 on Top Layer "3V3" (solid, remove dead copper, pour order 11): 1254,2330 ccw(c1232.27,2259) 1254,2188 1253,977 1224,707 ccw(c1194.45,635.31) 1120,657 ccw(c1195.15,638.68) 1185,562 1171,415 1171,361 1272,361 1325,361 1325,573 ccw(c1325.54,627.46) 1380,628 1380,921 cw(c1439,921) 1439,980 1457.12,977 2537,977 2553,993 2553,2330
NetF2_3 on Top Layer "12VOut" (solid, remove dead copper, pour order 17): 3516,2686 4721,2686 4721,2900 4680,2941 4676,2945 3516,2945 3516,2686
GND on Bottom Layer "GND" (solid, remove dead copper, pour order 12): 109,3293 109,541 109,513 769.01,513.08 770,513 770,541 770,100 903.61,100 4876,100 4876,134 4876,158 4876,3348 114,3348 109,3348 109,3342 109,3339 109,3335.69 109,3334 109,3332 109,3331.18 109,3329 109,3325 109,3317.96 109,3313.9 109,3312 109,3307 109,3304 108.99,3296.07
12V on Bottom Layer "12V" (solid, remove dead copper, pour order 9): 311.28,3004.91 285.69,3004.91 285.69,3135.31 285,3136 274,3147 274,3227 292,3227 331,3266 354,3289 685,3289 685,3004.82 634.7,2954.53 627.23,2962 573,2962 573,3055 560,3068 526.19,3066.4 465,3066.4 465,3109.72 311.28,3109.72 312,3061 312,3005.63

## Silkscreen, mask and mechanical layers (free items; w line width, h text height)
Top Overlay:
  text "Baja-004-PDU-Rev_1" at 2198,627 h60
  text "Brian Richard-FA17" at 2199,512 h60
Bottom Overlay:
  drawing of 4214 lines, arcs and shapes, not listed
Mechanical 4:
  the board outline again, w10

## Text inside footprints (layer, text, board x,y; h text height)
MCU1: Top Overlay "73" at 1513,1124 h30; Top Overlay "1" at 2292,2065 h30